# EAGLE board transmitter_F_pcb (EAGLE 6.1)
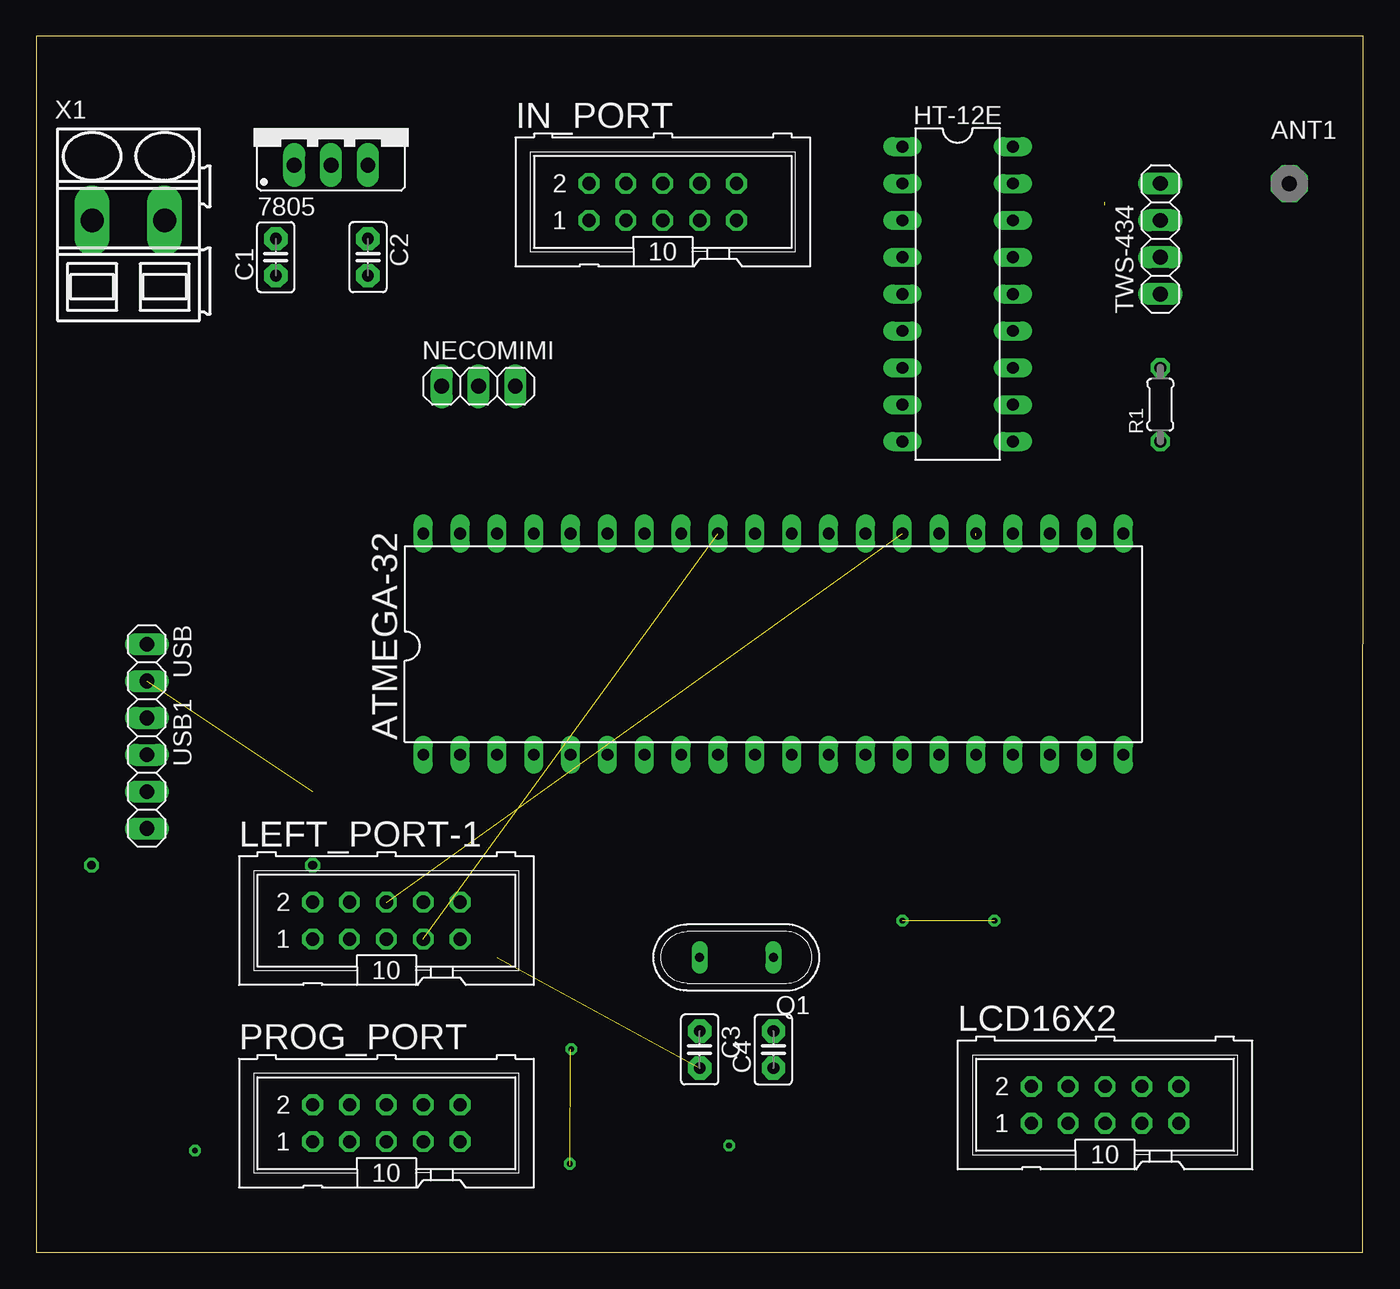
[diagram p0: board, top side]
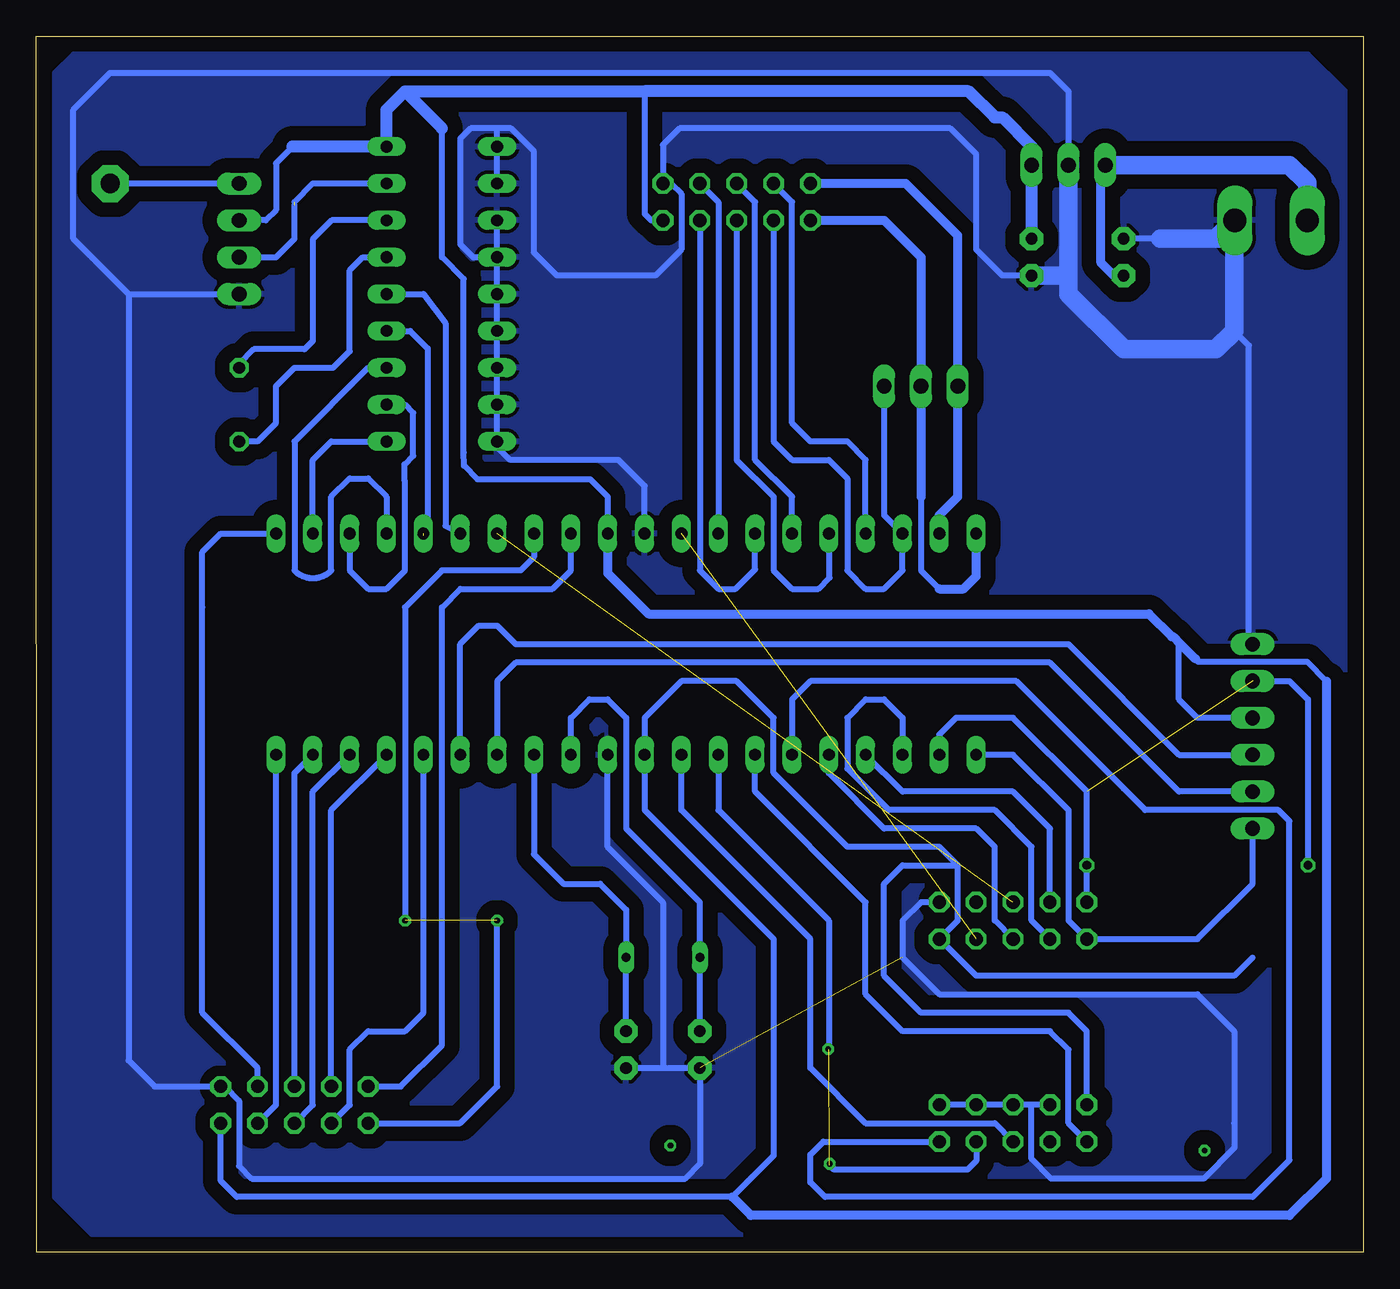
[diagram p1: board, bottom side, seen from below]

Size 91.45 x 83.81 mm. Coordinates in mm from the lower left corner, seen from the top.
Outline: 0,0 91.42,0 91.45,83.8 0,83.81 0,0
Copper layers (1*16): Top 0.035mm / dielectric 1.5mm / Bottom 0.035mm
Design rules: minimum track width 10mil, minimum drill 24mil, track to track 8mil, track to pad 8mil, pad to pad 8mil, via to via 8mil, smd to smd 8mil, copper to edge 40mil, drill to drill 8mil, minimum pad ring 10mil, minimum via ring 8mil, stop-mask expansion 4mil, vias tented up to drill 0mil, thermal gap 10mil

## Footprints (pad centres in the part's own frame; a part is rotated, then mirrored left to right if it is on the bottom)
78XXS = drill 1.016 long: GND 0,-2.54; IN -2.54,-2.54; OUT 2.54,-2.54
PAD-01 = drill 1.321 pad 2.54 octagon: 1 0,0
DIL40 = drill 0.813 long: 1 -24.13,-7.62; 2 -21.59,-7.62; 3 -19.05,-7.62; 4 -16.51,-7.62; 5 -13.97,-7.62; 6 -11.43,-7.62; 7 -8.89,-7.62; 8 -6.35,-7.62; 9 -3.81,-7.62; 10 -1.27,-7.62; 11 1.27,-7.62; 12 3.81,-7.62; 13 6.35,-7.62; 14 8.89,-7.62; 15 11.43,-7.62; 16 13.97,-7.62; 17 16.51,-7.62; 18 19.05,-7.62; 19 21.59,-7.62; 20 24.13,-7.62; 21 24.13,7.62; 22 21.59,7.62; 23 19.05,7.62; 24 16.51,7.62; 25 13.97,7.62; 26 11.43,7.62; 27 8.89,7.62; 28 6.35,7.62; 29 3.81,7.62; 30 1.27,7.62; 31 -1.27,7.62; 32 -3.81,7.62; 33 -6.35,7.62; 34 -8.89,7.62; 35 -11.43,7.62; 36 -13.97,7.62; 37 -16.51,7.62; 38 -19.05,7.62; 39 -21.59,7.62; 40 -24.13,7.62
C2.5-2 = drill 0.813 pad 1.6 octagon: 1 -1.27,0; 2 1.27,0
DIL18 = drill 0.813 long: 1 -10.16,-3.81; 2 -7.62,-3.81; 3 -5.08,-3.81; 4 -2.54,-3.81; 5 0,-3.81; 6 2.54,-3.81; 7 5.08,-3.81; 8 7.62,-3.81; 9 10.16,-3.81; 10 10.16,3.81; 11 7.62,3.81; 12 5.08,3.81; 13 2.54,3.81; 14 0,3.81; 15 -2.54,3.81; 16 -5.08,3.81; 17 -7.62,3.81; 18 -10.16,3.81
ML10 = drill 0.914 octagon: 1 -5.08,-1.27; 2 -5.08,1.27; 3 -2.54,-1.27; 4 -2.54,1.27; 5 0,-1.27; 6 0,1.27; 7 2.54,-1.27; 8 2.54,1.27; 9 5.08,-1.27; 10 5.08,1.27
1X03 = drill 1.016 long: 1 -2.54,0; 2 0,0; 3 2.54,0
QS = drill 0.61 long: 1 -2.54,0; 2 2.54,0
0204/5 = drill 0.813 octagon: 1 -2.54,0; 2 2.54,0
1X04 = drill 1.016 long: 1 -3.81,0; 2 -1.27,0; 3 1.27,0; 4 3.81,0
SMKDSP_1,5/2 = drill 1.6 pad 1.8 long: 1 -2.5,0; 2 2.5,0

## Placement (x,y rotation side)
7805  [78XXS]  20.32,77.47 0 top
ANT1  [PAD-01]  86.36,73.66 0 top
ATMEGA-32  [DIL40]  50.8,41.91 0 top
C1  0.33uF  [C2.5-2]  16.51,68.58 90 top
C2  0.1uF  [C2.5-2]  22.86,68.58 270 top
C3  22pF  [C2.5-2]  45.72,13.97 270 top
C4  22pF  [C2.5-2]  50.8,13.97 90 top
HT-12E  [DIL18]  63.5,66.04 270 top
IN_PORT  [ML10]  43.18,72.39 0 top
LCD16X2  [ML10]  73.66,10.16 0 top
LEFT_PORT-1  [ML10]  24.13,22.86 0 top
NECOMIMI  [1X03]  30.48,59.69 0 top
PROG_PORT  [ML10]  24.13,8.89 0 top
Q1  [QS]  48.26,20.32 180 top
R1  750k  [0204/5]  77.47,58.42 90 top
TWS-434  [1X04]  77.47,69.85 90 top
USB  [1X04]  7.62,38.1 270 top
USB1  [1X04]  7.62,33.02 270 top
X1  SMKDSP_1,5/2  [SMKDSP_1,5/2]  6.35,71.12 0 top

## Library data of the parts
7805 = v-reg
ANT1 = discrete
ATMEGA-32 HT-12E = ic-package
C1-C4 = capacitor-wima
IN_PORT LCD16X2 LEFT_PORT-1 PROG_PORT = con-harting-ml; OC_FARNELL: unknown; OC_NEWARK: unknown
NECOMIMI TWS-434 USB USB1 = pinhead
Q1 = special
R1 = resistor
X1 = con-phoenix-smkdsp; MF: FARNELL; MPN: 1733570; OC_FARNELL: 3041244; OC_NEWARK: 69C8588

## Nets
GND1: 7805.GND ATMEGA-32.11 ATMEGA-32.31 C1.2 C2.2 C3.2 C4.1 HT-12E.1 HT-12E.2 HT-12E.3 HT-12E.4 HT-12E.5 HT-12E.6 HT-12E.7 HT-12E.8 HT-12E.9 IN_PORT.10 LCD16X2.10 LEFT_PORT-1.10 PROG_PORT.4 PROG_PORT.6 PROG_PORT.8 PROG_PORT.10 TWS-434.1 USB.1 X1.2
N$1: ATMEGA-32.27 LEFT_PORT-1.6
N$2: ATMEGA-32.29 LCD16X2.2
N$3: 7805.IN C1.1 X1.1
N$4: ATMEGA-32.40 IN_PORT.1
N$5: ATMEGA-32.28 LCD16X2.1
N$6: ATMEGA-32.39 IN_PORT.2
N$7: ATMEGA-32.6 PROG_PORT.9
N$8: HT-12E.15 R1.1
N$9: HT-12E.16 R1.2
N$10: ATMEGA-32.12 C3.1 Q1.2
N$11: ATMEGA-32.13 C4.2 Q1.1
N$12: ATMEGA-32.38 IN_PORT.3 NECOMIMI.3
N$13: ATMEGA-32.37 IN_PORT.4
N$14: ATMEGA-32.36 IN_PORT.5
N$15: ATMEGA-32.35 IN_PORT.6
N$16: ATMEGA-32.34 IN_PORT.7
N$17: ATMEGA-32.33 IN_PORT.8
N$18: ATMEGA-32.8 PROG_PORT.7
N$19: ATMEGA-32.9 PROG_PORT.5
N$20: ATMEGA-32.7 PROG_PORT.1
N$21: ATMEGA-32.22 HT-12E.10
N$22: ATMEGA-32.23 HT-12E.11
N$23: ATMEGA-32.24 HT-12E.12
N$24: ATMEGA-32.25 HT-12E.13
N$25: ATMEGA-32.26 HT-12E.14
N$26: HT-12E.17 TWS-434.2
N$27: ATMEGA-32.32 LEFT_PORT-1.7
N$30: ANT1.1 TWS-434.4
N$34: ATMEGA-32.16 LCD16X2.3
N$35: ATMEGA-32.17 LCD16X2.4
N$36: ATMEGA-32.18 LCD16X2.5
N$37: ATMEGA-32.19 LCD16X2.6
N$38: ATMEGA-32.20 LCD16X2.7
N$39: ATMEGA-32.21 LCD16X2.8
N$41: ATMEGA-32.1 LEFT_PORT-1.1 USB1.4
N$42: ATMEGA-32.2 LEFT_PORT-1.2 USB.2
N$43: ATMEGA-32.3 LEFT_PORT-1.3
N$44: ATMEGA-32.4 LEFT_PORT-1.4
N$45: ATMEGA-32.5 LEFT_PORT-1.5
S$45: ATMEGA-32.14 USB1.3
S$46: ATMEGA-32.15 USB.4
VCC: 7805.OUT ATMEGA-32.10 ATMEGA-32.30 C2.1 HT-12E.18 IN_PORT.9 LCD16X2.9 LEFT_PORT-1.9 PROG_PORT.2 TWS-434.3 USB.3

## Tracks (layer width: path | path; a pad name or v marks a point on that pad's centre or on a via)
GND1  (1 unrouted)
  Bottom 0.406: 13.97,69.85 C1.2 | USB.1 7.88,41.91 7.88,62.49 8.89,63.5 | C2.2 24.87,67.31 26.67,69.11 26.67,75.67 28.47,77.47 47.11,77.47 48.26,76.33 IN_PORT.10 47.7,73.66 46.99,72.95 46.99,69.11 48.79,67.31 55.56,67.31 57.15,68.9 57.15,75.88 58.74,77.47 59.69,77.47 | 59.69,77.47 61.52,77.47 62.23,76.76 62.23,69.48 61.33,68.58 HT-12E.4 | ATMEGA-32.31 49.53,52.81 51.33,54.61 58.79,54.61 59.69,55.51 HT-12E.9 HT-12E.8 HT-12E.7 HT-12E.6 HT-12E.5 HT-12E.4 | HT-12E.4 HT-12E.3 | HT-12E.2 HT-12E.1 59.69,77.47 | PROG_PORT.4 22.86,10.16 | 22.86,10.16 PROG_PORT.6 PROG_PORT.8 PROG_PORT.10 | LEFT_PORT-1.10 30.48,24.13 31.75,22.86 31.75,20.32 29.21,17.78 11.43,17.78 8.89,15.24 8.89,8.89 8.87,7.2 10.99,5.08 21.51,5.08 22.86,6.43 22.86,10.16 | C4.1 48.26,12.7 | 48.26,12.7 C3.2 45.72,6.08 46.72,5.08 76.59,5.08 77.47,5.96 77.47,10.45 78.45,11.43 LCD16X2.10 83.31,11.43 85.09,13.21 85.09,66.04 | 48.26,12.7 48.26,24.13 52.07,27.94 ATMEGA-32.11 | 85.09,66.04 88.9,69.85 88.9,78.74 86.36,81.28 21.59,81.28 20.32,80.01 7805.GND | 85.09,66.04 TWS-434.1
  Bottom 1.27: 13.97,69.85 10.16,69.85 | 10.16,69.85 8.89,71.12 | 10.16,69.85 8.89,69.85 8.89,63.5 10.16,62.23 16.51,62.23 20.32,66.04 20.32,67.31 | 7805.GND 20.32,67.31 | C2.2 20.32,67.31
  pour Bottom (isolate 1.016): 1.27,78.74 1.27,80.01 3.81,82.55 88.9,82.55 90.17,81.28 90.17,3.81 87.63,1.27 2.54,1.27 1.27,2.54
N$1  (1 unrouted)
N$2
  Bottom 0.406: LCD16X2.2 66.34,11.43 63.5,14.27 63.5,44.45 62.23,45.72 55.88,45.72 54.61,46.99 ATMEGA-32.29
N$3
  Bottom 0.61: C1.1 17.18,67.31 18.07,68.2 18.07,74.64 7805.IN
  Bottom 1.27: X1.1 3.85,73.7 5.08,74.93 7805.IN
N$4
  Bottom 0.406: 30.48,52.07 30.48,46.99 29.21,45.72
  Bottom 0.61: IN_PORT.1 33.02,71.12 30.48,68.58 30.48,52.07 | 29.21,45.72 27.55,45.72 26.67,46.6 ATMEGA-32.40
N$5  (via drill 0.4)  (1 unrouted)
  Bottom 0.406: ATMEGA-32.28 57.15,47.92 58.07,47 63.49,47 66.04,44.45 v66.04,22.86 | LCD16X2.1 62.23,8.89 59.69,11.43 v59.69,22.86
N$6
  Bottom 0.61: ATMEGA-32.39 29.21,50.8 27.94,52.07 27.94,70.07 31.53,73.66 IN_PORT.2
N$7
  Bottom 0.406: ATMEGA-32.6 39.37,38.1 38.1,39.37 23.91,39.37 16.51,31.96 15.02,30.48 5.84,30.48 5.08,29.72 5.08,6.35 7.62,3.81 37.09,3.81 38.1,4.82 38.1,6.73 37.21,7.62 PROG_PORT.9
N$8
  Bottom 0.406: HT-12E.15 68.96,68.58 69.85,67.69 69.85,62.11 71,60.96 73.66,60.96 74.93,59.69 74.93,57.15 76.2,55.88 R1.1
N$9
  Bottom 0.406: HT-12E.16 71.08,71.12 72.39,69.81 72.39,62.81 72.97,62.23 76.47,62.23 77.47,61.23 R1.2
N$10
  Bottom 0.406: C3.1 Q1.2 45.72,24.13 50.8,29.21 50.8,36.83 52.07,38.1 53.34,38.1 54.61,36.83 ATMEGA-32.12
N$11
  Bottom 0.406: C4.2 Q1.1 50.8,23.6 52.6,25.4 55.12,25.4 57.15,27.43 ATMEGA-32.13
N$12
  Bottom 0.406: IN_PORT.3 40.64,55.88 39.37,54.61 36.83,54.61 35.56,53.34 35.56,46.99 34.29,45.72 33.02,45.72 31.75,46.99 ATMEGA-32.38 33.02,50.8 NECOMIMI.3
N$13
  Bottom 0.406: ATMEGA-32.37 34.29,54.61 35.56,55.88 38.1,55.88 39.37,57.15 39.37,72.39 IN_PORT.4
N$14
  Bottom 0.406: IN_PORT.5 43.18,54.61 40.64,52.07 40.64,46.99 39.37,45.72 37.55,45.72 36.77,46.5 36.77,49.47 ATMEGA-32.36
N$15
  Bottom 0.406: ATMEGA-32.35 39.37,52.07 41.91,54.61 41.91,72.39 IN_PORT.6
N$16
  Bottom 0.406: IN_PORT.7 45.72,46.99 44.45,45.72 43.26,45.72 41.91,47.07 ATMEGA-32.34
N$17
  Bottom 0.406: IN_PORT.8 44.45,72.39 ATMEGA-32.33
N$18  (1 unrouted)
  Bottom 0.406: ATMEGA-32.8 44.45,30.48 36.83,22.86 36.83,13.97 | PROG_PORT.7 26.67,6.3 27.27,5.7 36.47,5.7 36.77,6
N$19
  Bottom 0.406: PROG_PORT.5 25.4,8.89 34.29,8.89 38.1,12.7 38.1,21.59 46.99,30.48 ATMEGA-32.9
N$20
  Bottom 0.406: PROG_PORT.1 20.32,8.89 20.32,13.97 21.59,15.24 31.75,15.24 34.29,17.78 34.29,24.13 41.91,31.75 ATMEGA-32.7
N$21
  Bottom 0.406: ATMEGA-32.22 72.39,54.61 71.12,55.88 HT-12E.10
N$22
  Bottom 0.406: ATMEGA-32.23 69.85,46.99 68.58,45.72 67.31,45.72 66.04,46.99 66.04,53.17 66.07,53.2 66.07,54.3 65.47,54.9 65.47,57.85 66.04,58.42 HT-12E.11
N$23
  Bottom 0.406: HT-12E.12 68.58,60.96 73.66,55.88 73.66,46.99 arc-90 71.12,46.99 71.12,52.07 69.85,53.34 68.58,53.34 67.31,52.07 ATMEGA-32.24
N$24  (1 unrouted)
  Bottom 0.406: HT-12E.13 65.67,63.5 64.47,62.3 64.47,49.7 64.77,49.4
N$25
  Bottom 0.406: HT-12E.14 64.77,66.04 63.25,64.03 63.25,50.06 ATMEGA-32.26
N$26  (1 unrouted)
  Bottom 0.406: HT-12E.17 72.39,73.66 73.66,72.39 | TWS-434.2 74.93,68.58 73.66,69.85 73.66,72.17
N$27  (1 unrouted)
N$30
  Bottom 0.406: TWS-434.4 ANT1.1
N$34
  Bottom 0.406: LCD16X2.3 69.85,10.16 69.85,13.97 68.58,15.24 66.04,15.24 64.77,16.51 ATMEGA-32.16
N$35
  Bottom 0.406: LCD16X2.4 71.12,30.48 ATMEGA-32.17
N$36
  Bottom 0.406: LCD16X2.5 72.39,10.16 72.39,31.75 ATMEGA-32.18
N$37
  Bottom 0.406: LCD16X2.6 73.66,33.02 ATMEGA-32.19
N$38
  Bottom 0.406: LCD16X2.7 76.2,9.21 75.88,9.21 74.93,10.16 ATMEGA-32.20
N$39
  Bottom 0.406: LCD16X2.8 76.2,12.7 80.01,16.51 80.01,44.45 80.01,48.26 78.74,49.53 ATMEGA-32.21
N$41
  Bottom 0.406: ATMEGA-32.1 24.13,34.29 20.32,30.48 20.32,22.86 LEFT_PORT-1.1 11.43,21.59 7.62,25.4 USB1.4
N$42  (via drill 0.6)  (1 unrouted)
  Bottom 0.406: LEFT_PORT-1.2 v19.05,26.67 19.05,31.75 24.13,36.83 28.06,36.83 29.21,35.69 ATMEGA-32.2 | USB.2 5.08,39.37 3.81,38.1 v3.81,26.67
N$43
  Bottom 0.406: LEFT_PORT-1.3 22.86,22.86 22.86,27.94 25.4,30.48 32.7,30.48 35.56,33.34 35.56,36.83 34.29,38.1 33.02,38.1 31.75,36.83 ATMEGA-32.3
N$44
  Bottom 0.406: LEFT_PORT-1.4 21.59,29.21 24.13,31.75 31.75,31.75 ATMEGA-32.4
N$45
  Bottom 0.406: LEFT_PORT-1.5 25.4,22.86 25.4,27.94 26.67,29.21 33.02,29.21 36.83,33.02 ATMEGA-32.5
S$1  (via drill 0.4)
  other vias: 36.77,6.1
S$2  (via drill 0.4)
  other vias: 36.87,14
S$3  (via drill 0.4)
  other vias: 10.94,7.01
S$4  (via drill 0.4)
  other vias: 47.75,7.35
S$5  (via drill 0.4)
  other vias: 19.05,10.16
S$6  (via drill 0.4)
  other vias: 21.59,10.16
S$7  (via drill 0.4)
  other vias: 24.13,10.16
S$8  (via drill 0.4)
  other vias: 26.67,10.16
S$9  (via drill 0.4)
  other vias: 29.21,10.16
S$10  (via drill 0.4)
  other vias: 29.21,7.62
S$11  (via drill 0.4)
  other vias: 26.67,7.62
S$12  (via drill 0.4)
  other vias: 24.13,7.62
S$13  (via drill 0.4)
  other vias: 21.59,7.62
S$14  (via drill 0.4)
  other vias: 19.05,7.62
S$15  (via drill 0.4)
  other vias: 38.1,73.66
S$16  (via drill 0.4)
  other vias: 40.64,73.66
S$17  (via drill 0.4)
  other vias: 43.18,73.66
S$18  (via drill 0.4)
  other vias: 45.72,73.66
S$19  (via drill 0.4)
  other vias: 48.26,73.66
S$20  (via drill 0.4)
  other vias: 48.26,71.12
S$21  (via drill 0.4)
  other vias: 45.72,71.12
S$22  (via drill 0.4)
  other vias: 43.18,71.12
S$23  (via drill 0.4)
  other vias: 40.64,71.12
S$24  (via drill 0.4)
  other vias: 38.1,71.12
S$25  (via drill 0.4)
  other vias: 19.05,24.13
S$26  (via drill 0.4)
  other vias: 21.59,24.13
S$27  (via drill 0.4)
  other vias: 24.13,24.13
S$28  (via drill 0.4)
  other vias: 26.67,24.13
S$29  (via drill 0.4)
  other vias: 29.21,24.13
S$30  (via drill 0.4)
  other vias: 29.21,21.59
S$31  (via drill 0.4)
  other vias: 26.67,21.59
S$32  (via drill 0.4)
  other vias: 24.13,21.59
S$33  (via drill 0.4)
  other vias: 21.59,21.59
S$34  (via drill 0.4)
  other vias: 19.05,21.59
S$35  (via drill 0.4)
  other vias: 68.58,11.43
S$36  (via drill 0.4)
  other vias: 71.12,11.43
S$37  (via drill 0.4)
  other vias: 73.66,11.43
S$38  (via drill 0.4)
  other vias: 76.2,11.43
S$39  (via drill 0.4)
  other vias: 78.74,11.43
S$40  (via drill 0.4)
  other vias: 78.74,8.89
S$41  (via drill 0.4)
  other vias: 76.2,8.89
S$42  (via drill 0.4)
  other vias: 73.66,8.89
S$43  (via drill 0.4)
  other vias: 71.12,8.89
S$44  (via drill 0.4)
  other vias: 68.58,8.89
S$45
  Bottom 0.406: USB1.3 12.7,31.75 21.59,40.64 58.42,40.64 59.69,39.37 ATMEGA-32.14
S$46
  Bottom 0.406: ATMEGA-32.15 62.23,41.91 60.96,43.18 59.69,43.18 58.42,41.91 20.32,41.91 12.7,34.29 USB.4
VCC
  Bottom 0.406: 49.53,80.01 49.53,71.57 49.08,71.12 IN_PORT.9 48.63,71.12 | ATMEGA-32.30 52.07,52.07 53.26,53.26 61.04,53.26 61.04,53.27 61.98,54.21 62,55.14 62,67.08 63.5,68.58 63.5,77.47 | 73.78,76.2 74.93,75.05 74.93,71.83 75.64,71.12 TWS-434.3 | 7.62,20.32 8.89,19.05 26.67,19.05 LEFT_PORT-1.9 27.94,22.86 27.94,26.67 | 27.94,26.67 29.21,27.94 35.56,27.94 40.64,33.02 40.64,36.83 43.18,39.37 46.99,39.37 49.53,36.83 ATMEGA-32.10 49.53,30.48 40.64,21.59 40.64,6.65 43.48,3.81 77.63,3.81 78.74,4.92 LCD16X2.9 | PROG_PORT.2 19.05,15.24 20.32,16.51 30.48,16.51 33.02,19.05 33.02,25.4 31.75,26.67 27.94,26.67 | 11.57,40.9 11.37,40.7 3.87,40.7 2.54,39.37 | USB.3 11.43,36.83 12.7,38.1 12.7,41.91 12.64,41.97
  Bottom 0.61: ATMEGA-32.30 52.07,46.8 49.27,44 14.77,44 13.2,42.43 13.1,42.43 12.64,41.97 11.57,40.9 | 2.54,39.37 2.54,5.08 5.08,2.54 42.21,2.54 43.48,3.81
  Bottom 0.813: C2.1 7805.OUT 22.86,76.2 24.87,78.21 25.4,78.21 27.2,80.01 49.53,80.01 66.04,80.01 | 66.04,80.01 67.31,78.74 HT-12E.18 73.78,76.2 | 63.5,77.47 66.04,80.01